# Altium PCB czujnikV2.PcbDoc
Units mil, origin at the board's own origin, x right, y up, seen from the top; angles counter-clockwise.
Board outline 6000 x 4000 mil, 2 copper layers (Top Layer, Bottom Layer); 4 components, 8 nets, 26 pads, 2 vias.
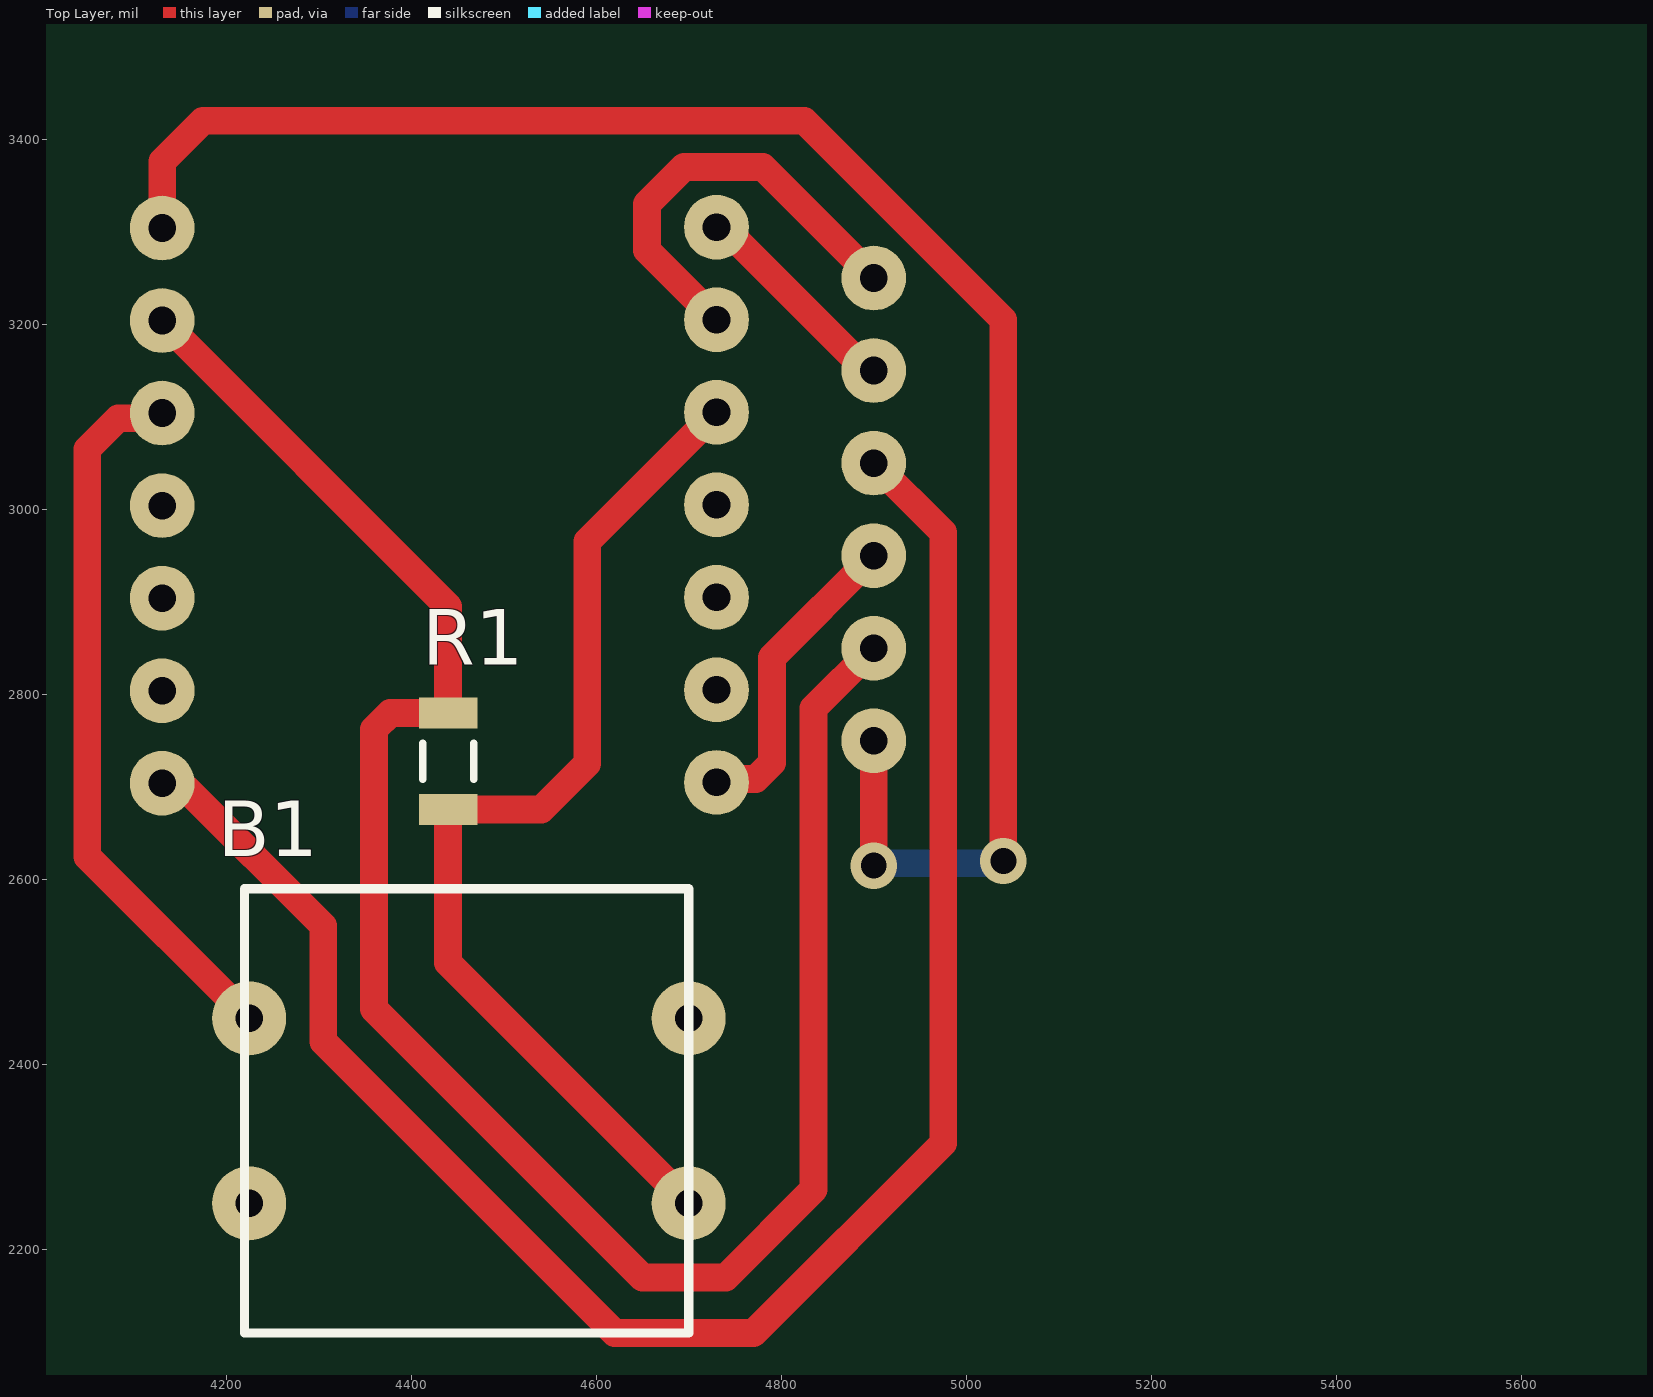
[diagram p0: Top Layer view]
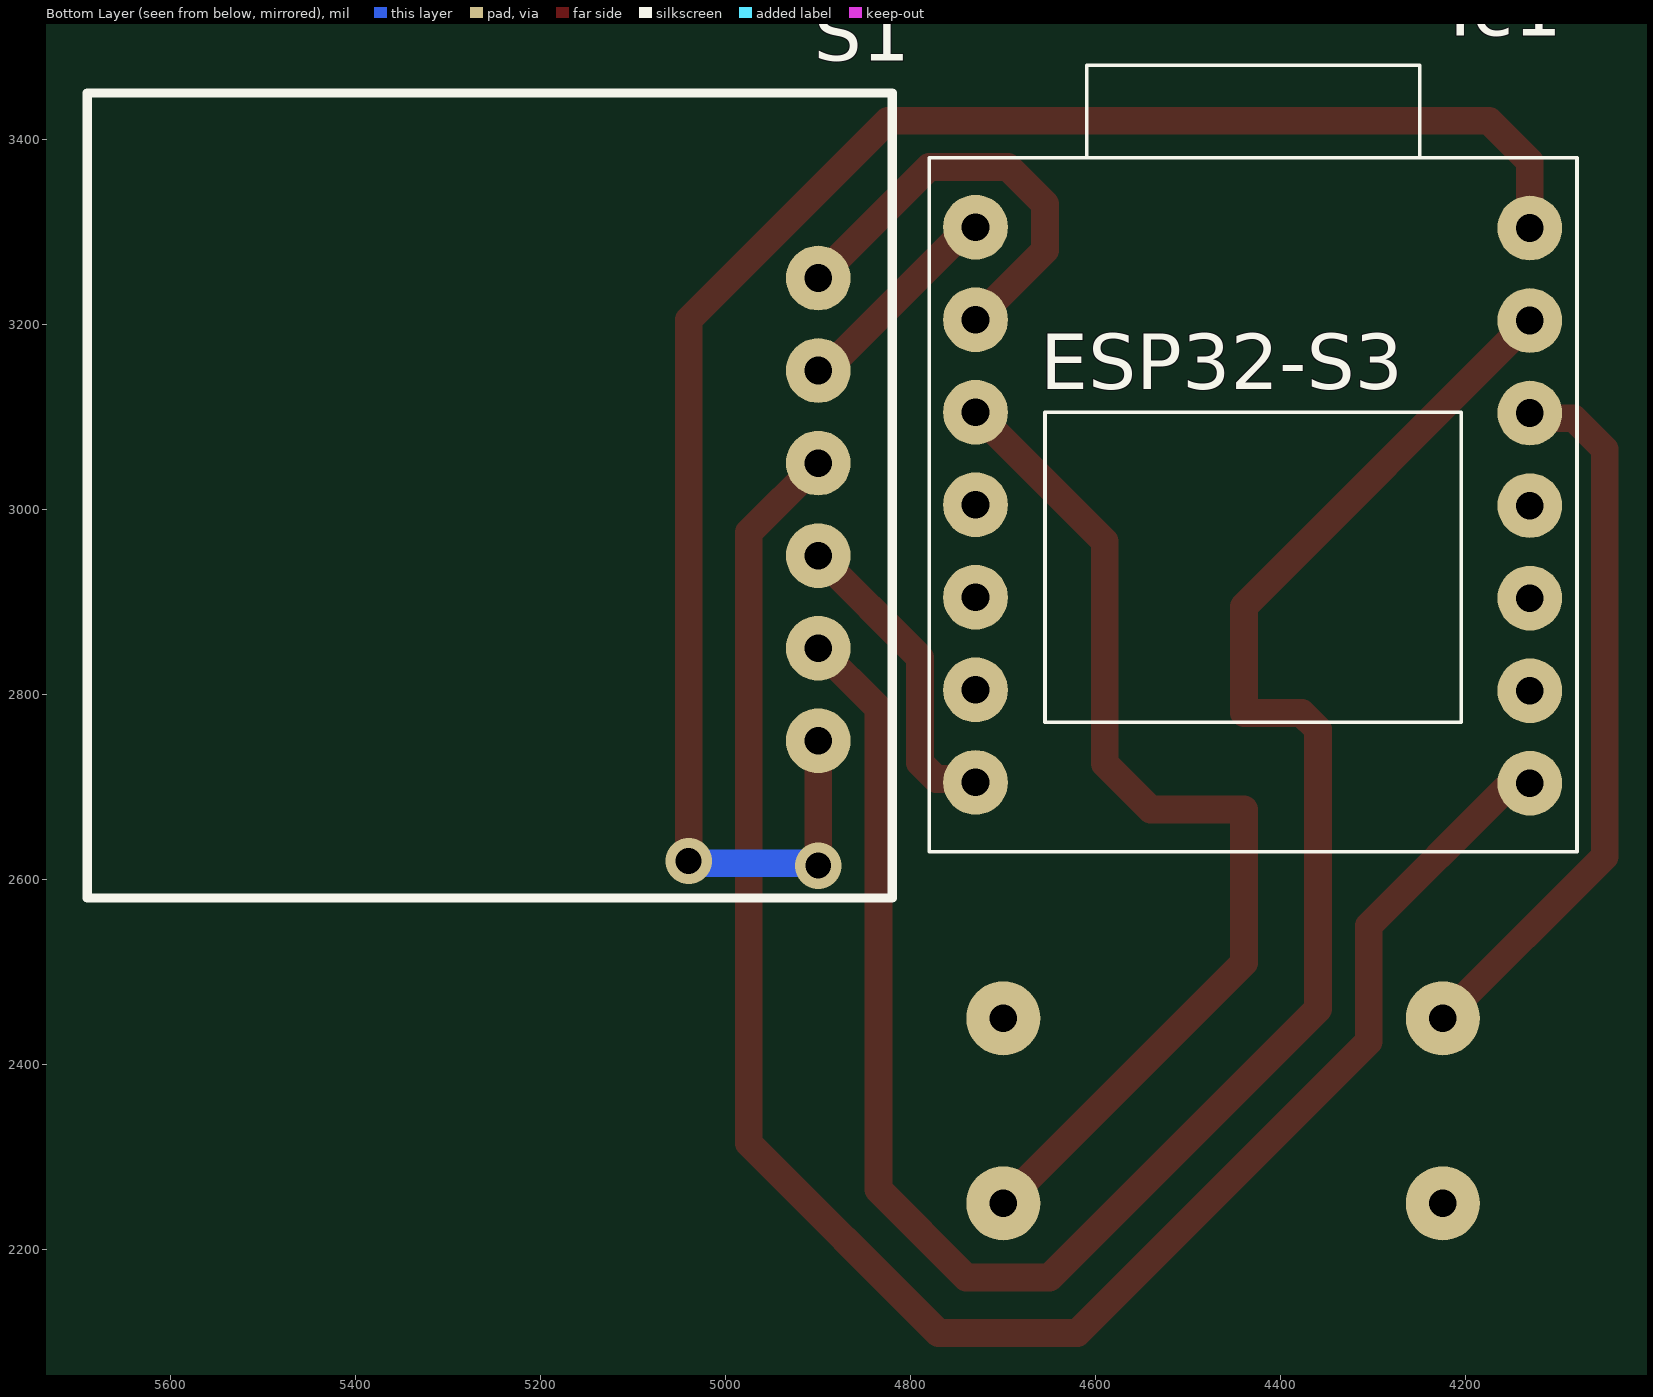
[diagram p1: Bottom Layer view, seen from below]

## Layer stack, top to bottom
Top Solder: solder mask 0.4, Solder Resist, Dk 3.5
Top Layer: signal copper 1.4
Dielectric 1: dielectric 12.6, FR-4, Dk 4.8
Bottom Layer: signal copper 1.4
Bottom Solder: solder mask 0.4, Solder Resist, Dk 3.5

## Board outline
1000,1000 7000,1000 7000,5000 1000,5000

## Design rules (kind name [scope] priority, off if disabled: settings)
Clearance [All] p1: gap=10 ignorepadtopadclearanceinfootprint=FALSE except(0: Arc-Hole Track-Hole SMDPad-Hole THPad-Hole Via-Hole Fill-Hole Poly-Hole Region-Hole Text-Hole)
PolygonConnect [All] p1: connectstyle=Relief reliefconductorwidth=10 reliefentries=4 polygonreliefangle="90 Angle" airgapwidth=10
RoutingVias [All] p1: holewidth=28 width=50 viastyle="Through Hole" minholewidth=28 minwidth=50 maxholewidth=28 maxwidth=50
SolderMaskExpansion [All] p1: expansion=4 istentingtop=FALSE
Width [All] p1: maxlimit=50 minlimit=10 preferedwidth=30 minimp=50.000000 maximp=50.000000 favimp=50.000000
30 further rules are at their usual default settings.

## Components (designator, comment, footprint, x,y, rotation, side; value= is the part's Value field where it differs from the comment)
B1 "button 12x12" button12x12 4460,2350 r0 top
Ic1 "ESP32-S3_xiao" ESP32-S3 4430,3005 r180 bottom
R1 "RC1206FR-10750RL" RESC3116X65X40LL10T20 4440,2727.83 r90 top
S1 "DFRobot C1001" C1001 4900,2750 r0 bottom

## Footprints (in the part's own frame and the unit in brackets; to place one, negate y for a bottom-side part, rotate by r counter-clockwise, add the part's x,y. Pads: shape width x height; smd on the part's side, far side on the other; paste and mask are expansions set on the pad)
button12x12 [mil]
  round 80 hole 30: 1(-235,100) 2(240,100) 3(-235,-100) 4(240,-100)
  silkscreen extent -240,-240 240,240
C1001 [mil]
  round 70 hole 30: 1(0,0) 2(0,-100) 3(0,-200) 4(0,-300) 5(0,-400) 6(0,-500)
  silkscreen extent -80,-700 790,170
ESP32-S3 [mil]
  round 70 hole 30: 1(-300,300) 2(-300,200) 3(-300,100) 4(-300,0) 5(-300,-100) 6(-300,-200) 7(-300,-300) 8(299.07,-300.93) 9(299.07,-200.93) 10(299.07,-100.93) 11(299.07,-0.93) 12(299.07,99.07) 13(299.07,199.07) 14(299.07,299.07)
  silkscreen extent -350,-375 350,475
RESC3116X65X40LL10T20 [mm] "Chip Resistor, 2-Leads, Body 3.10x1.60mm, IPC High Density"
  rect 0.85x1.6 smd: 1(-1.325,0) 2(1.325,0)
  silkscreen extent -0.5,-0.7 0.5,0.7, body extent -1.6,-0.85 1.6,0.85, height 0.65

## Part data
B1: library part button12x12
R1: library part CMP-2003-04964-1, Manufacturer=Yageo, Part Number=RC1206FR-10750RL
S1: library part C1001

## Via types
v1: diameter 50, hole 28, Top Layer to Bottom Layer, 2 vias

## Nets (pads, with @x,y where several pads share a name; then routed paths per layer and width w, separated by ;. In a path a pad name is that pad's centre, name@x,y a point inside that pad or via, vN(x,y) a via of type N, cw(c..) or ccw(c..) an arc to the next point about the centre after c; other vN are vias at no path point)
GND: Ic1.13 R1.2 S1.2 | length 2188.2
  Top Layer w30: Ic1.13 4440,2895 R1.2 4377.57,2780 4360,2762.43 4360,2460 4650,2170 4740,2170 4835,2265 4835,2785 S1.2
NetB1_1: B1.1 Ic1.12 | length 784.6
  Top Layer w30: Ic1.12 4125.29,3098.43 4083.43,3098.43 4050,3065 4050,2625 B1.1
NetB1_4: B1.4 Ic1.3 R1.1 | length 1141.8
  Top Layer w30: B1.4 4440,2510 R1.1 4540.67,2675.67 4590.38,2725.38 4590.38,2965.38 Ic1.3
NetIc1_1: Ic1.1 S1.5 | length 234.2
  Top Layer w30: Ic1.1 4737.5,3305 4892.5,3150 S1.5
NetIc1_2: Ic1.2 S1.6 | length 467.3
  Top Layer w30: Ic1.2 4655,3280 4655,3330 4695,3370 4780,3370 S1.6
NetIc1_7: Ic1.7 S1.3 | length 338.1
  Top Layer w30: Ic1.7 4733.64,2708.64 4772.43,2708.64 4790,2726.21 4790,2840 S1.3
NetIc1_8: Ic1.8 S1.4 | length 2014.3
  Top Layer w30: Ic1.8 4136.67,2698.33 4156.67,2698.33 4305,2550 4305,2425 4620,2110 4770,2110 4975,2315 4975,2975 S1.4
NetIc1_14: Ic1.14 S1.1 | length 1961.1
  Top Layer w30: Ic1.14 4130.93,3375.93 4175,3420 4825,3420 5040,3205 v1(5040,2620) ; v1(4900,2615) S1.1 S1.1@4907.65,2757.65
  Bottom Layer w30: v1(4900,2615) 4902.5,2617.5 5037.5,2617.5 v1(5040,2620)
pads on no net: B1.2 B1.3 Ic1.4 Ic1.5 Ic1.6 Ic1.9 Ic1.10 Ic1.11

## Text inside footprints (layer, text, board x,y; h text height)
Ic1: Bottom Overlay "ESP32-S3" at 4660,3130 h60